# EAGLE board Cool Curcan-Rottis (EAGLE 9.7.0)

Size 82.4 x 107.24 mm. Coordinates in mm from the lower left corner, seen from the top.
Outline: 0,0 82.4,0 82.4,107.24 0,107.24 0,0
Copper layers (1*16): Top 0.035mm / dielectric 1.5mm / Bottom 0.035mm
Design rules "default": minimum track width 6mil, minimum drill 0.35mm, track to track 6mil, track to pad 6mil, pad to pad 6mil, via to via 6mil, smd to smd 6mil, copper to edge 40mil, drill to drill 6mil, minimum pad ring 10mil, minimum via ring 8mil, stop-mask expansion 4mil, vias tented up to drill 0mil, thermal gap 10mil

## Footprints (pad centres in the part's own frame; a part is rotated, then mirrored left to right if it is on the bottom)
LED-RGB-5MM = drill 0.9: B 0.635,0.635; C -0.635,-0.635; G 1.905,-0.635; R -1.905,0.635
RESAD1016W63L850D250B = drill 0.83 pad 1.43: 1 -5.08,0; 2 5.08,0
HA-06-SM065 = drill 1 pad 1.676: 1 -2.54,-2.54; 2 0,2.54; 3 2.54,-2.54
ARDUINO-UNO-R3-SHIELD = drill 1.016 pad 1.88: 3.3V 24.13,-2.54; 5V 24.13,0; A0 24.13,12.7; A1 24.13,15.24; A2 24.13,17.78; A3 24.13,20.32; A4 24.13,22.86; A5 24.13,25.4; AREF -24.13,-13.97; D2 -24.13,20.32; D3 -24.13,17.78; D4 -24.13,15.24; D5 -24.13,12.7; D6 -24.13,10.16; D7 -24.13,7.62; D8 -24.13,3.81; D9 -24.13,1.27; D10 -24.13,-1.27; D11 -24.13,-3.81; D12 -24.13,-6.35; D13 -24.13,-8.89; GND@0 24.13,2.54; GND@1 24.13,5.08; GND@2 -24.13,-11.43; IOREF 24.13,-7.62; NC 24.13,-10.16; RES 24.13,-5.08; RX -24.13,25.4; SCL -24.13,-19.05; SDA -24.13,-16.51; TX -24.13,22.86; VIN 24.13,7.62

## Placement (x,y rotation side)
D1  LED-RGBRCBG-PTH  [LED-RGB-5MM]  44.07,36.2 0 top
R1  220  [RESAD1016W63L850D250B]  50.42,31.11 0 top
R2  220  [RESAD1016W63L850D250B]  52.96,36.2 0 top
R3  220  [RESAD1016W63L850D250B]  35.18,36.2 0 top
RPOT1  10k  [HA-06-SM065]  19.94,10.79 0 top
RPOT2  10k  [HA-06-SM065]  37.72,10.79 0 top
RPOT3  10k  [HA-06-SM065]  55.5,8.26 0 top
U1  ARDUINO-UNO-R3-SHIELD  [ARDUINO-UNO-R3-SHIELD]  34.52,77.4 90 top

## Library data of the parts
D1 R1-R3 RPOT1-RPOT3 U1 = Tinkercad

## Nets
D1_B: D1.B R1.1
D1_G: D1.G R2.1
D1_R: D1.R R3.2
U1_5V: RPOT1.1 RPOT2.1 RPOT3.1 U1.5V
U1_A0: RPOT1.2 U1.A0
U1_A1: RPOT2.2 U1.A1
U1_A2: RPOT3.2 U1.A2
U1_D9: R3.1 U1.D9
U1_D10: R2.2 U1.D10
U1_D11: R1.2 U1.D11
U1_GND: D1.C RPOT1.3 RPOT2.3 RPOT3.3 U1.GND@0 U1.GND@1 U1.GND@2

## Tracks (layer width: path | path; a pad name or v marks a point on that pad's centre or on a via)
D1_B  (1 unrouted)
D1_G  (1 unrouted)
D1_R  (1 unrouted)
U1_5V  (3 unrouted)
U1_A0  (1 unrouted)
U1_A1  (1 unrouted)
U1_A2  (1 unrouted)
U1_D9  (1 unrouted)
U1_D10  (1 unrouted)
U1_D11  (1 unrouted)
U1_GND  (6 unrouted)